# EAGLE board arduino-shield-xyz-stepper-v2 (EAGLE 8.7.1)
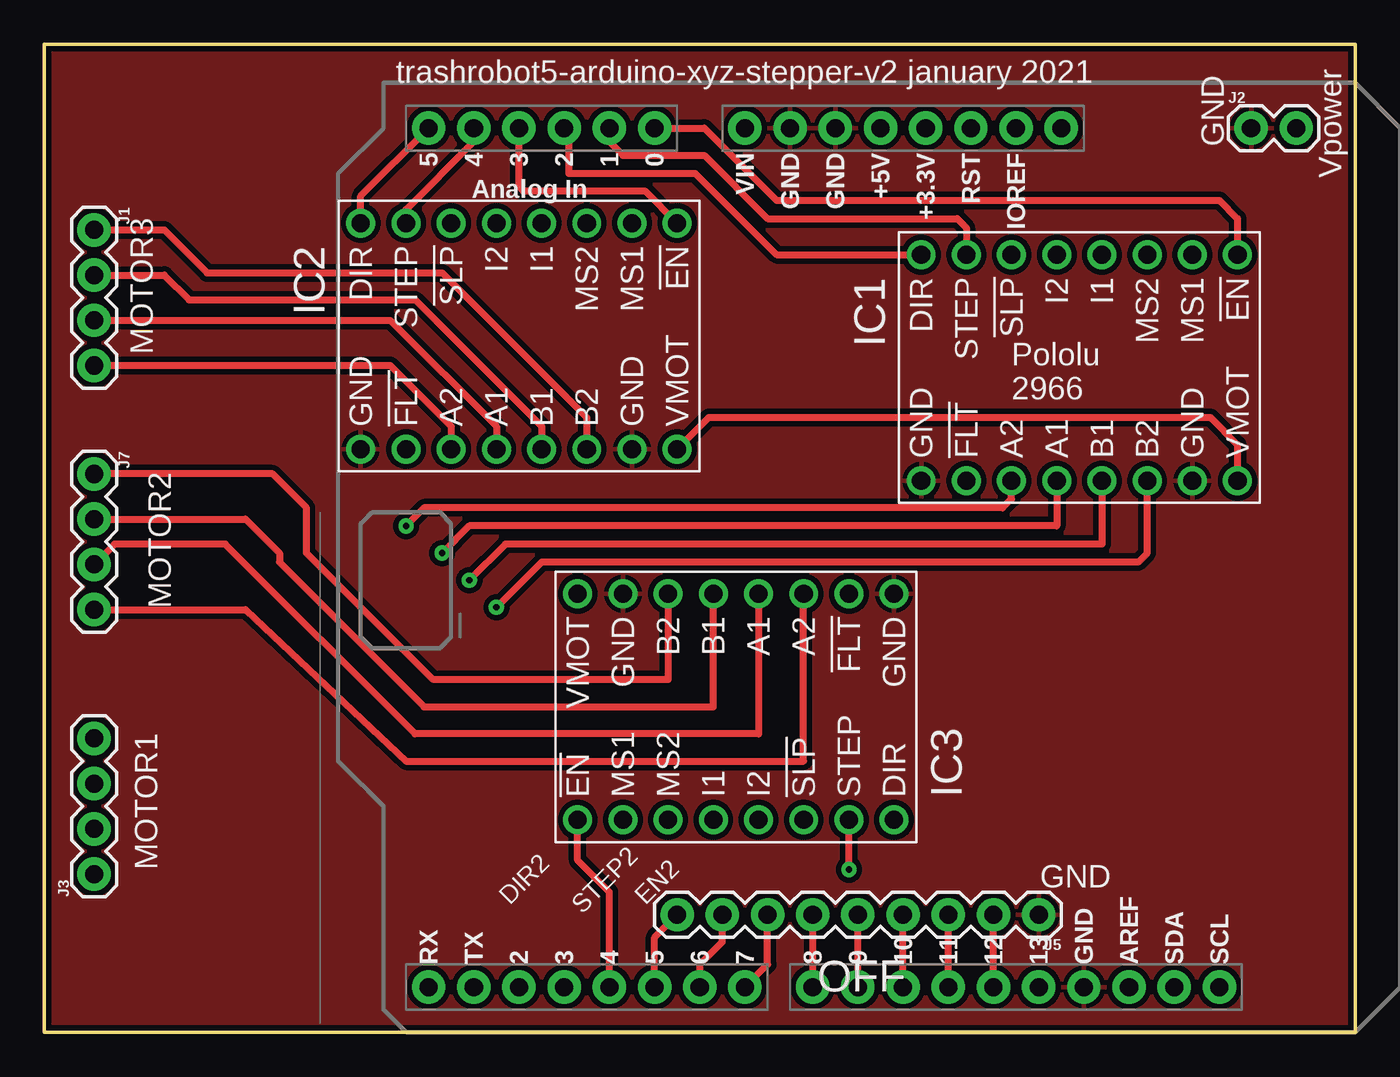
[diagram p0: board, top side]
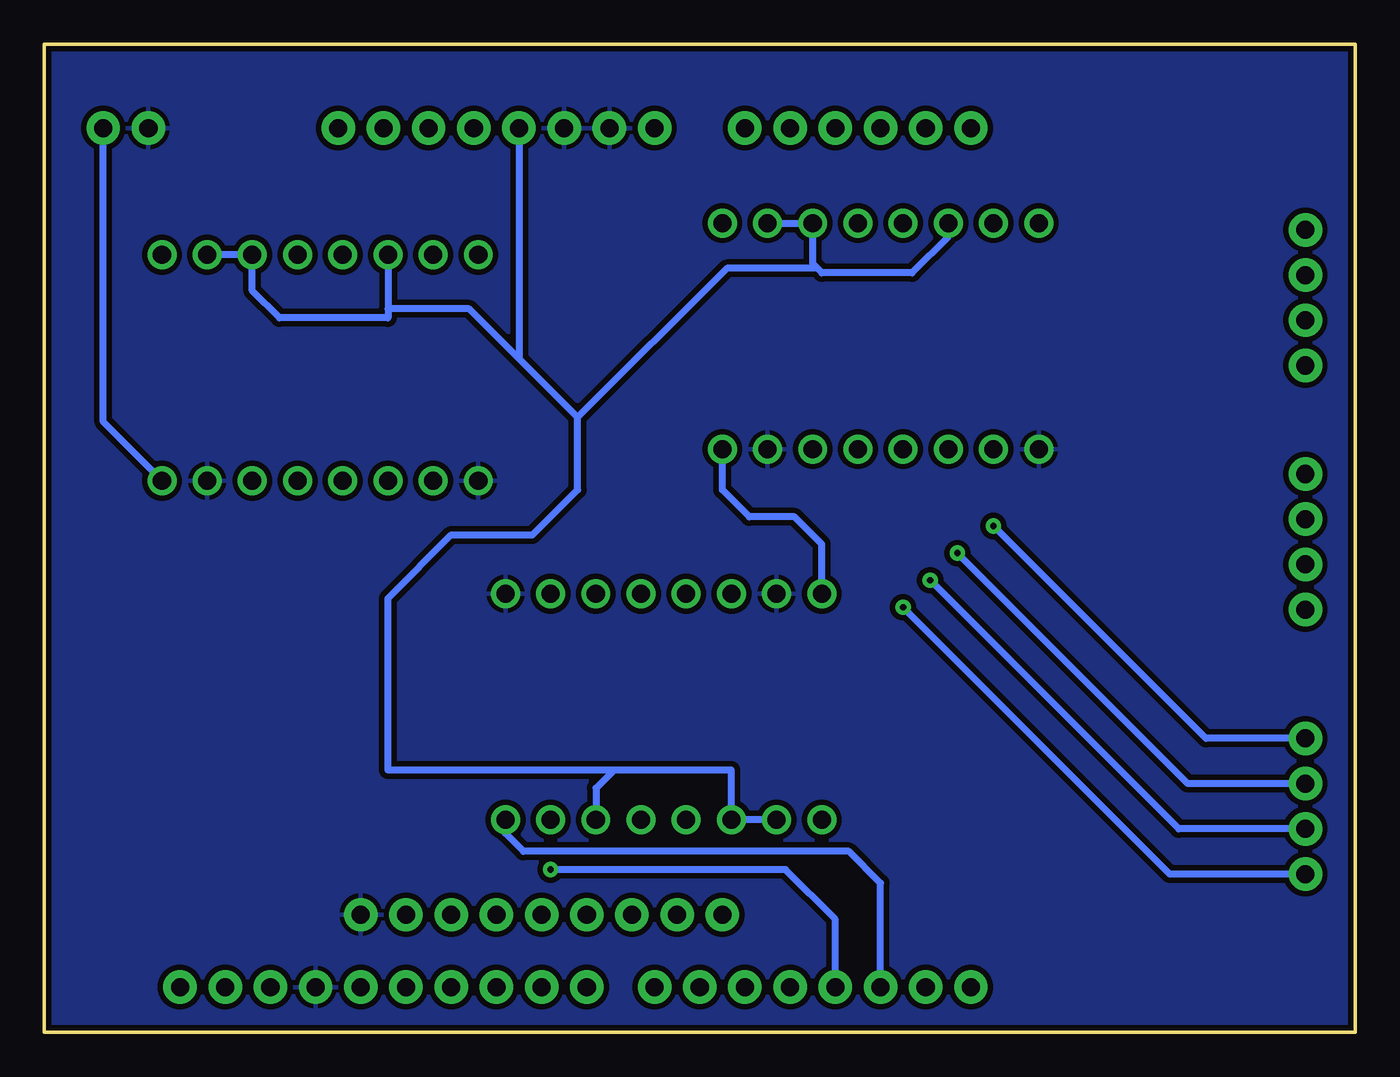
[diagram p1: board, bottom side, seen from below]

Size 73.66 x 55.5 mm. Coordinates in mm from the lower left corner, seen from the top.
Outline: 0,55.5 0,0 73.66,0 73.66,55.5 0,55.5
Copper layers (1*16): Top 0.035mm / dielectric 1.5mm / Bottom 0.035mm
Design rules "default": minimum track width 8mil, minimum drill 20mil, track to track 8mil, track to pad 8mil, pad to pad 8mil, via to via 8mil, smd to smd 8mil, copper to edge 10mil, drill to drill 8mil, minimum pad ring 12mil, minimum via ring 10mil, stop-mask expansion 4mil, vias tented up to drill 25mil, thermal gap 10mil
Net classes: 0 Default: width 0.178 mm; 1 vcc: width 0.178 mm

## Footprints (pad centres in the part's own frame; a part is rotated, then mirrored left to right if it is on the bottom)
MP6500 = drill 1.016: 1 -6.35,8.89; 2 -6.35,6.35; 3 -6.35,3.81; 4 -6.35,1.27; 5 -6.35,-1.27; 6 -6.35,-3.81; 7 -6.35,-6.35; 8 -6.35,-8.89; 9 6.35,-8.89; 10 6.35,-6.35; 11 6.35,-3.81; 12 6.35,-1.27; 13 6.35,1.27; 14 6.35,3.81; 15 6.35,6.35; 16 6.35,8.89
1X04 = drill 1.016 pad 1.88: 1 0,0; 2 2.54,0; 3 5.08,0; 4 7.62,0
1X02 = drill 1.016 pad 1.88: 1 0,0; 2 2.54,0
UNO_R3_SHIELD = drill 1.016 pad 1.88: 3.3V 50.8,26.67; 5V 50.8,29.21; A0 50.8,41.91; A1 50.8,44.45; A2 50.8,46.99; A3 50.8,49.53; A4 50.8,52.07; A5 50.8,54.61; AREF 2.54,15.24; D2 2.54,49.53; D3 2.54,46.99; D4 2.54,44.45; D5 2.54,41.91; D6 2.54,39.37; D7 2.54,36.83; D8 2.54,33.02; D9 2.54,30.48; D10 2.54,27.94; D11 2.54,25.4; D12 2.54,22.86; D13 2.54,20.32; GND@0 50.8,31.75; GND@1 50.8,34.29; GND@2 2.54,17.78; IOREF 50.8,21.59; NC 50.8,19.05; RES 50.8,24.13; RX 2.54,54.61; SCL 2.54,10.16; SDA 2.54,12.7; TX 2.54,52.07; VIN 50.8,36.83
1X09 = drill 1.016 pad 1.88: 1 0,0; 2 2.54,0; 3 5.08,0; 4 7.62,0; 5 10.16,0; 6 12.7,0; 7 15.24,0; 8 17.78,0; 9 20.32,0

## Placement (x,y rotation side)
IC1  2967-MP6500  [MP6500]  58.17,37.34 270 top
IC2  2967-MP6500  [MP6500]  26.67,39.12 270 top
IC3  2967-MP6500  [MP6500]  38.86,18.29 90 top
J1  [1X04]  2.79,45.09 270 top
J2  [1X02]  67.82,50.8 0 top
J3  [1X04]  2.79,8.89 90 top
J4  ARDUINO_R3_SHIELD  [UNO_R3_SHIELD]  76.2,0 90 top
J5  [1X09]  55.88,6.6 180 top
J7  [1X04]  2.79,31.37 270 top

## Library data of the parts
IC1-IC3 = pololu-stepper-driver
J1 J3 J7 = SparkFun-Connectors; PROD_ID: CONN-09696
J2 J5 = SparkFun-Connectors
J4 = SparkFun-Boards

## Nets
5V: IC1.2 IC1.3 IC1.6 IC2.2 IC2.3 IC2.6 IC3.2 IC3.3 IC3.6 J4.5V
12V: IC1.16 IC2.16 IC3.16 J2.2
DIR1: IC1.8 J4.A2
DIR2: IC3.8 J4.D2
DIR3: IC2.8 J4.A5
EN1: IC1.1 J4.A0
EN2: IC3.1 J4.D4
EN3: IC2.1 J4.A3
GND [vcc]: IC1.9 IC1.15 IC2.9 IC2.15 IC3.9 IC3.15 J2.1 J4.GND@0 J4.GND@1 J4.GND@2 J5.1
N$1: IC3.14 J7.1
N$4: IC3.13 J7.2
N$5: IC1.14 J3.1
N$6: IC1.13 J3.2
N$7: IC1.12 J3.3
N$8: IC1.11 J3.4
N$9: IC2.14 J1.1
N$10: IC2.13 J1.2
N$11: IC2.12 J1.3
N$12: IC2.11 J1.4
N$13: IC3.12 J7.3
N$14: IC3.11 J7.4
N$16: J4.D12 J5.2
N$17: J4.D11 J5.3
N$18: J4.D10 J5.4
N$19: J4.D9 J5.5
N$22: J4.D8 J5.6
N$23: J4.D7 J5.7
N$24: J4.D6 J5.8
N$25: J4.D5 J5.9
STEP1: IC1.7 J4.A1
STEP2: IC3.7 J4.D3
STEP3: IC2.7 J4.A4

## Tracks (layer width: path | path; a pad name or v marks a point on that pad's centre or on a via)
5V
  Bottom 0.406: IC3.2 IC3.3 35.05,14.73 41.66,14.73 | 41.66,14.73 42.67,13.72 IC3.6 | IC2.2 IC2.3 30.48,43.18 30.23,42.93 | IC2.6 22.86,44.7 24.89,42.67 29.97,42.67 30.23,42.93 | IC1.2 IC1.3 61.98,41.66 60.45,40.13 54.36,40.13 54.36,40.64 | IC1.6 54.36,40.64 | 41.66,14.73 54.36,14.73 54.36,24.38 50.8,27.94 46.23,27.94 43.69,30.48 43.69,34.54 | 54.36,40.64 49.78,40.64 46.99,37.85 | 43.69,34.54 46.99,37.85 | 30.23,42.93 35.31,42.93 43.69,34.54 | J4.5V 46.99,37.85
12V
  Top 0.406: IC2.16 37.34,34.54 65.53,34.54 67.06,33.02 IC1.16
  Bottom 0.406: IC1.16 70.36,34.29 J2.2 | IC3.16 29.97,27.43 31.5,28.96 34.04,28.96 35.56,30.48 IC2.16
DIR1
  Top 0.406: J4.A2 29.46,50.55 29.46,48.26 36.58,48.26 41.15,43.69 IC1.8
DIR2
  Bottom 0.406: J4.D2 26.67,8.38 28.45,10.16 46.74,10.16 47.75,11.18 IC3.8
DIR3
  Top 0.406: IC2.8 17.78,46.99 J4.A5
EN1
  Top 0.406: J4.A0 37.08,50.8 41.15,46.74 66.04,46.74 67.06,45.72 IC1.1
EN2
  Top 0.406: J4.D4 31.75,7.87 29.97,9.65 IC3.1
EN3
  Top 0.406: IC2.1 33.78,47.24 26.92,47.24 26.67,47.5 J4.A3
GND
  pour Top (isolate 0.305): -1.27,55.63 76.45,56.13 76.45,-0.25 -0.76,-0.25
  pour Bottom (isolate 0.305): -0.75,55.88 74.28,55.88 74.42,-0.51 -0.64,-0.51
N$1
  Top 0.406: IC3.14 35.05,19.81 21.84,19.81 14.73,26.92 14.73,29.46 12.83,31.37 J7.1
N$4
  Top 0.406: IC3.13 37.59,18.29 21.34,18.29 13.21,26.42 13.21,26.92 11.3,28.83 J7.2
N$5  (via drill 0.35)
  Top 0.406: IC1.14 61.98,26.92 61.47,26.42 27.94,26.42 v25.4,23.88
  Bottom 0.406: J3.1 10.41,8.89 v25.4,23.88
N$6  (via drill 0.35)
  Top 0.406: IC1.13 59.44,27.43 25.91,27.43 v23.88,25.4
  Bottom 0.406: J3.2 9.91,11.43 v23.88,25.4
N$7  (via drill 0.35)
  Top 0.406: IC1.12 56.9,28.45 23.88,28.45 v22.35,26.92
  Bottom 0.406: J3.3 9.4,13.97 v22.35,26.92
N$8  (via drill 0.35)
  Top 0.406: IC1.11 54.36,29.97 53.85,29.46 21.34,29.46 v20.32,28.45
  Bottom 0.406: J3.4 8.38,16.51 v20.32,28.45
N$9
  Top 0.406: J1.1 6.73,45.09 9.14,42.67 22.35,42.67 30.48,34.54 IC2.14
N$10
  Top 0.406: J1.2 6.73,42.55 8.13,41.15 20.83,41.15 27.94,34.04 IC2.13
N$11
  Top 0.406: J1.3 19.43,40.01 25.4,34.04 IC2.12
N$12
  Top 0.406: J1.4 19.43,37.47 22.86,34.04 IC2.11
N$13
  Top 0.406: IC3.12 40.13,16.76 20.83,16.76 10.16,27.43 3.94,27.43 J7.3
N$14
  Top 0.406: IC3.11 42.67,15.24 20.32,15.24 11.3,23.75 J7.4
N$16
  Top 0.406: J4.D12 J5.2
N$17
  Top 0.406: J4.D11 J5.3
N$18
  Top 0.406: J4.D10 J5.4
N$19
  Top 0.406: J4.D9 J5.5
N$22
  Top 0.406: J4.D8 J5.6
N$23
  Top 0.406: J4.D7 40.64,3.81 J5.7
N$24
  Top 0.406: J4.D6 36.83,3.81 38.1,5.08 J5.8
N$25
  Top 0.406: J4.D5 34.29,5.33 J5.9
STEP1
  Top 0.406: J4.A1 31.75,50.04 32.51,49.28 37.08,49.28 40.64,45.72 51.31,45.72 51.82,45.21 IC1.7
STEP2  (via drill 0.35)
  Top 0.406: v45.21,9.14 IC3.7
  Bottom 0.406: J4.D3 29.21,6.35 32,9.14 v45.21,9.14
STEP3
  Top 0.406: IC2.7 20.32,46.23 24.13,50.04 J4.A4

## Text on the board
tPlace: trashrobot5-arduino-xyz-stepper-v2 january 2021 | GND | Vpower | MOTOR3 | Pololu / 2966 | MOTOR2 | MOTOR1 | GND | DIR2 | STEP2 | EN2 | OFF
tValues: Tent Vias! | Arduino Wee v1.3